# EAGLE board rev3 (EAGLE 9.4.2)
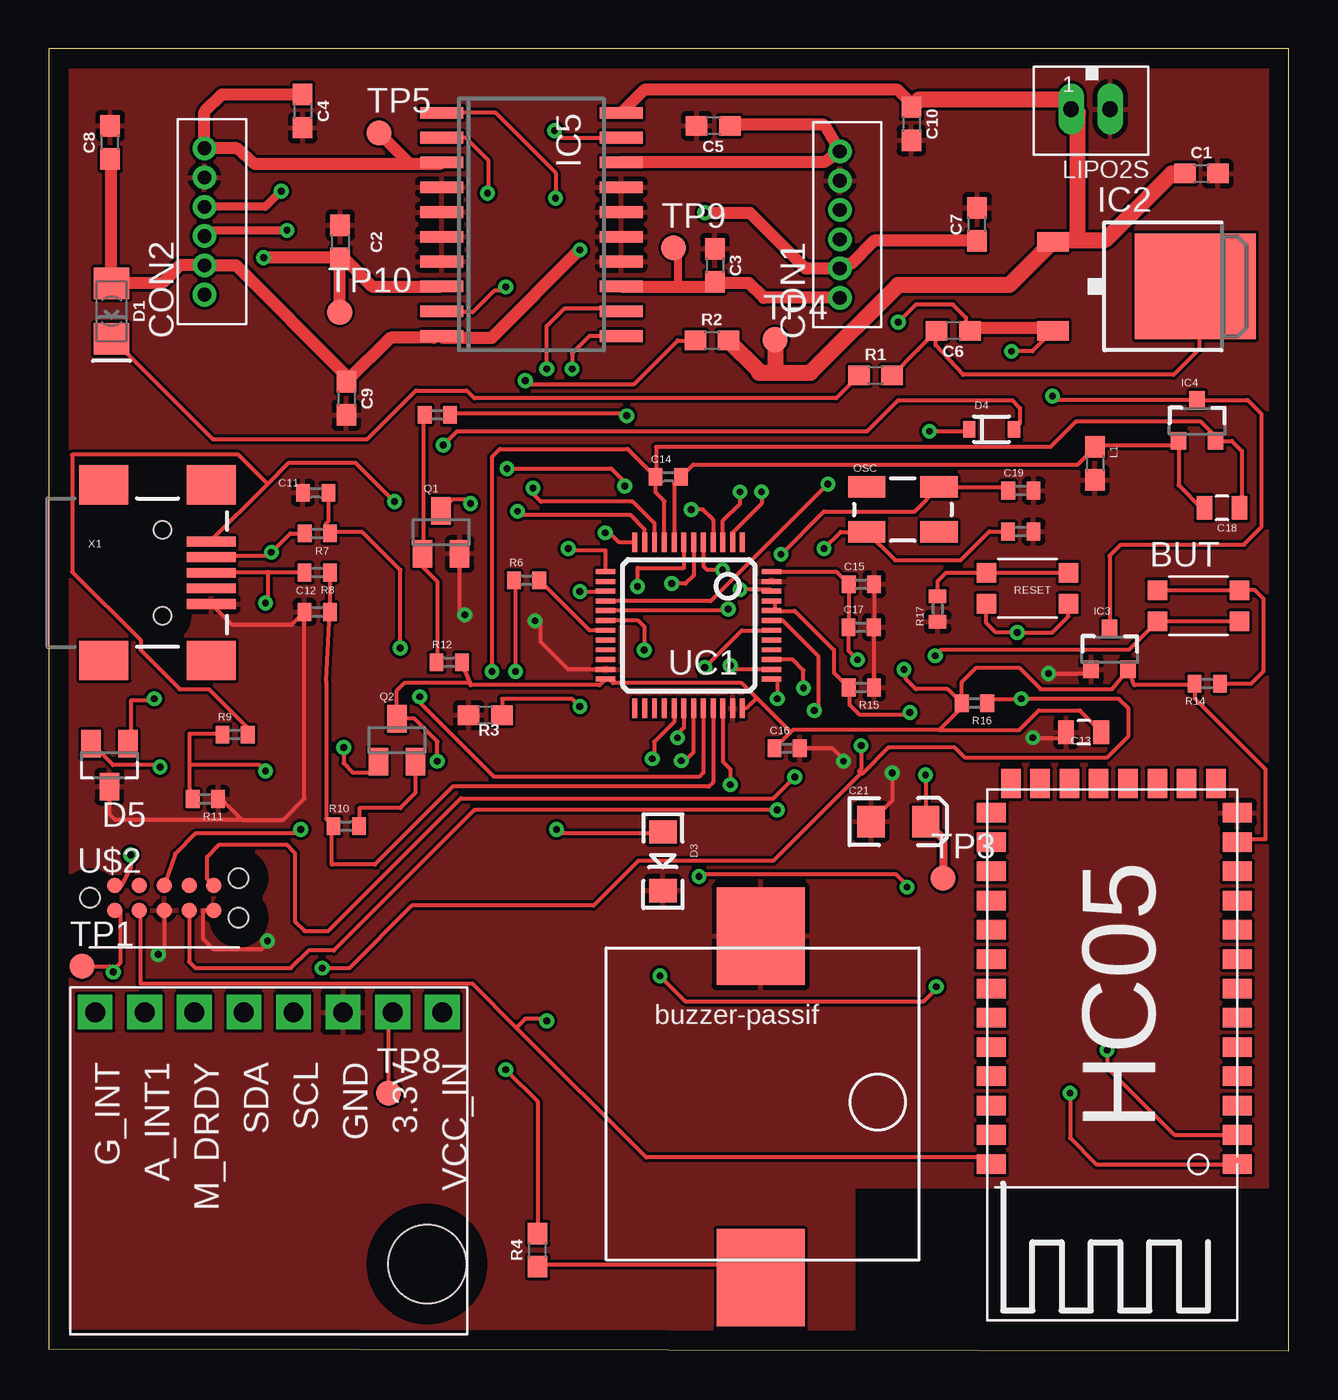
[diagram p0: board, top side]
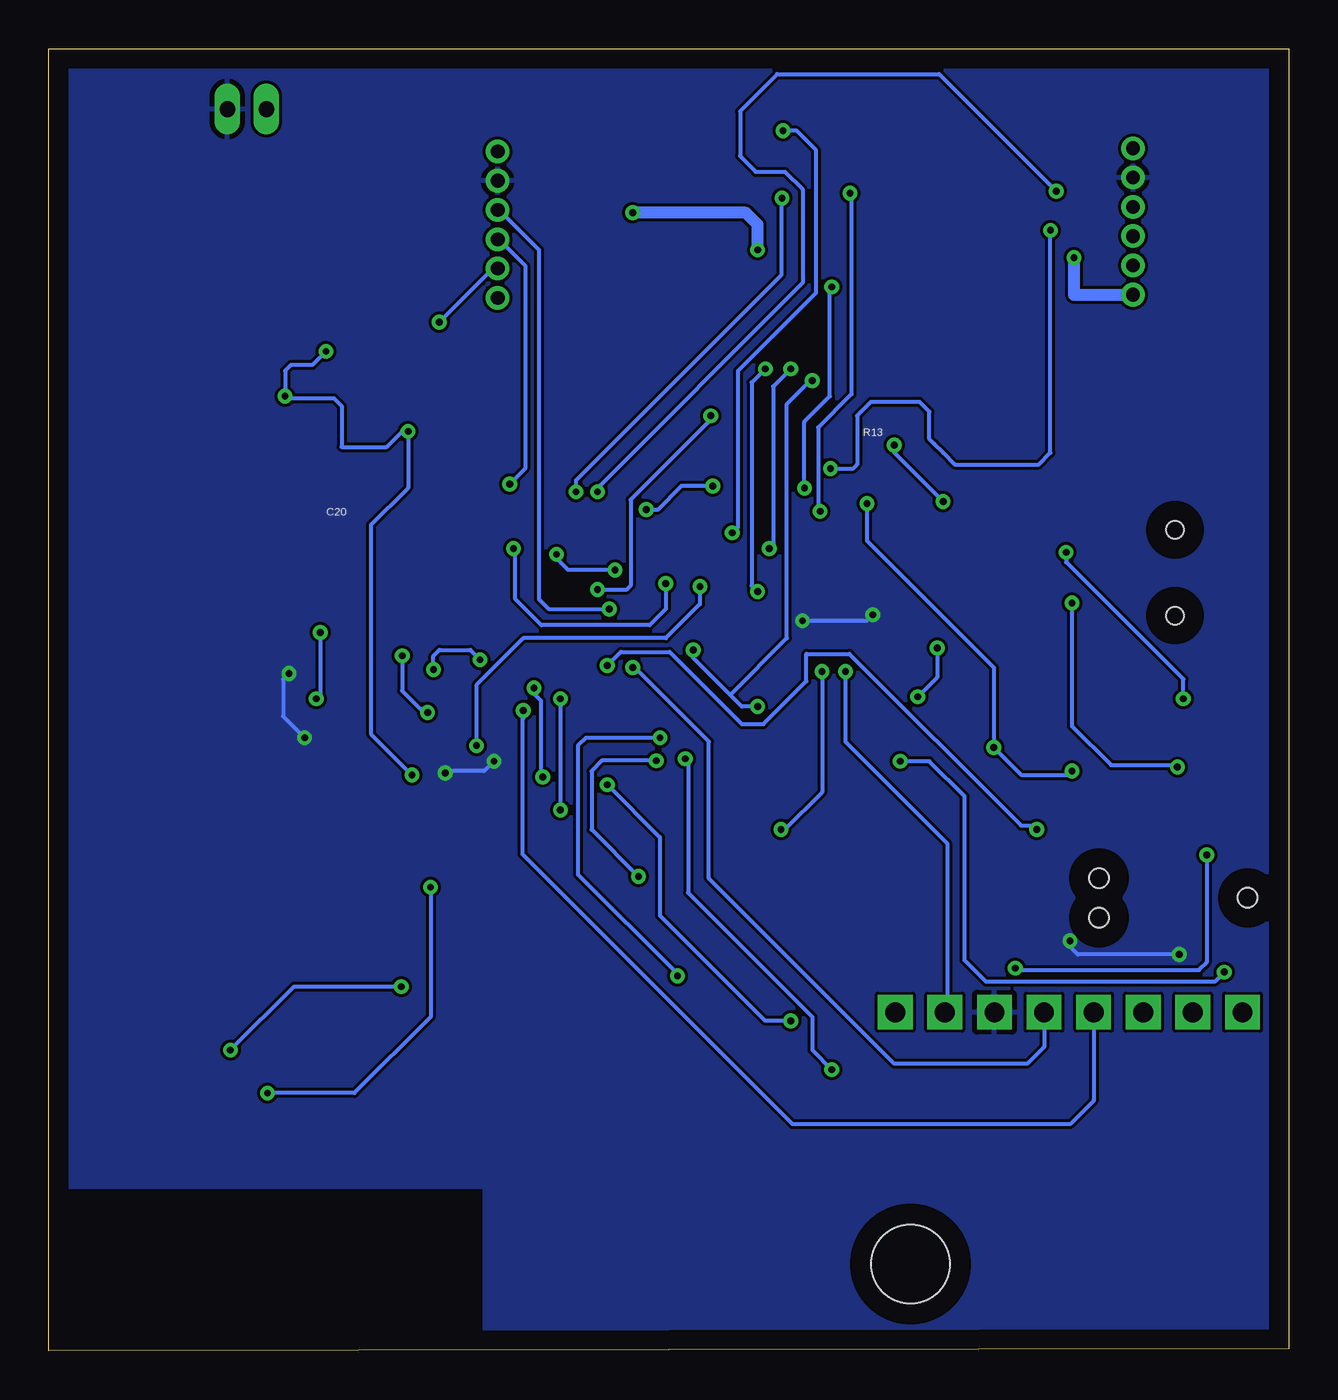
[diagram p1: board, bottom side, seen from below]

Size 63.5 x 66.7 mm. Coordinates in mm from the lower left corner, seen from the top.
Outline: 0,0.1 63.5,0 63.5,66.7 0,66.7 0,0.1
Copper layers (1*16): Top 0.035mm / dielectric 1.5mm / Bottom 0.035mm
Design rules "default": minimum track width 6mil, minimum drill 0.35mm, track to track 6mil, track to pad 6mil, pad to pad 6mil, via to via 6mil, smd to smd 6mil, copper to edge 40mil, drill to drill 6mil, minimum pad ring 10mil, minimum via ring 8mil, stop-mask expansion 4mil, vias tented up to drill 0mil, thermal gap 10mil
Net classes: 0 default: width 0.203 mm; 2 bigalime: width 0.381 mm

## Footprints (pad centres in the part's own frame; a part is rotated, then mirrored left to right if it is on the bottom)
PUSHBUTTON-KMR241GLFS = smd 1 x 1: P$1 2.1,0.8; P$2 2.1,-0.8; P$3 -2.1,0.8; P$4 -2.1,-0.8
0603 = smd 1.1 x 1: 1 -0.85,0; 2 0.85,0
C0402 = smd 0.7 x 0.9: 1 -0.65,0; 2 0.65,0
0805 = smd 0.8 x 1.2: 1 -0.9,0; 2 0.9,0
EIA3216 = smd 1.4 x 1.6: A 1.4,0; C -1.4,0
B6B-ZR = drill 0.7: 1 9,-1.3; 2 7.5,-1.3; 3 6,-1.3; 4 4.5,-1.3; 5 3,-1.3; 6 1.5,-1.3
FKIT-LED-1206 = smd 1.6 x 1.803: A -1.422,0; C 1.422,0
LED-1206 = smd 1.2 x 1.4: A -1.5,0; C 1.5,0
SOD-323 = smd 0.63 x 0.83: 1 -1.15,0; 2 1.15,0
SOT23 = smd 1 x 1.4: 1 -0.95,-1.1; 2 0.95,-1.1; 3 0,1.1
DPACK_3 = smd 1 x 1.6: 1 -2.28,-4.8; 3 2.28,-4.8 | smd 5.4 x 6.2: 4 0,2.5
SOT23' = smd 0.8 x 0.9: 1 -0.95,-1; 2 0.95,-1; 3 0,1.1
SO20 = smd 0.6 x 2.2: 1 -5.715,-4.6; 2 -4.445,-4.6; 3 -3.175,-4.6; 4 -1.905,-4.6; 5 -0.635,-4.6; 6 0.635,-4.6; 7 1.905,-4.6; 8 3.175,-4.6; 9 4.445,-4.6; 10 5.715,-4.6; 11 5.715,4.6; 12 4.445,4.6; 13 3.175,4.6; 14 1.905,4.6; 15 0.635,4.6; 16 -0.635,4.6; 17 -1.905,4.6; 18 -3.175,4.6; 19 -4.445,4.6; 20 -5.715,4.6
JST_B2B-PH_HEADER = drill 0.8 long: P1 1.075,0.048; P2 -0.925,0.048
CRYSTAL-SMD-5X3 = smd 1.9 x 1.1: 1 -1.85,-1.15; 2 1.85,-1.15; 3 1.85,1.15; 4 -1.85,1.15
B1,27 = smd 1.27 x 1.27: TP 0,0
BUZZER-PASSIF = smd 4.5 x 5: P$1 0,2.5; P$2 0,20
TC2030-MCP-NL = smd 0.787 x 0.787: 1 1.27,-0.635; 2 2.54,-0.635; 3 3.81,-0.635; 4 5.08,-0.635; 5 6.35,-0.635; 6 6.35,0.635; 7 5.08,0.635; 8 3.81,0.635; 9 2.54,0.635; 10 1.27,0.635 | hole 1: 0,0; 7.62,-1.016; 7.62,1.016
HC-05 = smd 1.5 x 1: 3.3 0,-16.5; GND 0,-18; KEY 12.6,0; P$3 0,-3; P$4 0,-4.5; P$5 0,-6; P$6 0,-7.5; P$7 0,-9; P$8 0,-10.5; P$9 0,-12; P$10 0,-13.5; P$11 0,-15; P$23 12.6,-1.5; P$24 12.6,-3; P$25 12.6,-4.5; P$26 12.6,-6; P$27 12.6,-7.5; P$28 12.6,-9; P$29 12.6,-10.5; P$30 12.6,-12; P$31 12.6,-13.5; P$32 12.6,-15; P$33 12.6,-16.5; P$34 12.6,-18; RX 0,-1.5; TX 0,0 | smd 1 x 1.5: P$14 1.1,-19.5; P$15 2.6,-19.5; P$16 4.1,-19.5; P$17 5.6,-19.5; P$18 7.1,-19.5; P$19 8.6,-19.5; P$20 10.1,-19.5; P$21 11.6,-19.5
GY-85 = drill 1.016 pad 1.778 square: 3.3 0,15.24; A_INT1 0,2.54; G_INT 0,0; GND 0,12.7; M_DRDY 0,5.08; SCL 0,10.16; SDA 0,7.62; VCC_IN 0,17.78 | hole 4: 12.9,17
LQFP48 = smd 0.254 x 1: 1 -2.75,-4.25; 2 -2.25,-4.25; 3 -1.75,-4.25; 4 -1.25,-4.25; 5 -0.75,-4.25; 6 -0.25,-4.25; 7 0.25,-4.25; 8 0.75,-4.25; 9 1.25,-4.25; 10 1.75,-4.25; 11 2.25,-4.25; 12 2.75,-4.25; 25 2.75,4.25; 26 2.25,4.25; 27 1.75,4.25; 28 1.25,4.25; 29 0.75,4.25; 30 0.25,4.25; 31 -0.25,4.25; 32 -0.75,4.25; 33 -1.25,4.25; 34 -1.75,4.25; 35 -2.25,4.25; 36 -2.75,4.25 | smd 1 x 0.254: 13 4.25,-2.75; 14 4.25,-2.25; 15 4.25,-1.75; 16 4.25,-1.25; 17 4.25,-0.75; 18 4.25,-0.25; 19 4.25,0.25; 20 4.25,0.75; 21 4.25,1.25; 22 4.25,1.75; 23 4.25,2.25; 24 4.25,2.75; 37 -4.25,2.75; 38 -4.25,2.25; 39 -4.25,1.75; 40 -4.25,1.25; 41 -4.25,0.75; 42 -4.25,0.25; 43 -4.25,-0.25; 44 -4.25,-0.75; 45 -4.25,-1.25; 46 -4.25,-1.75; 47 -4.25,-2.25; 48 -4.25,-2.75
USB-MINIB = smd 2.5 x 0.5: D+ 2.5,0; D- 2.5,0.8; GND 2.5,-1.6; ID 2.5,-0.8; VBUS 2.5,1.6 | smd 2.5 x 2: GND@1 -3,-4.5; GND@2 -3,4.5; GND@3 2.5,4.5; GND@4 2.5,-4.5 | hole 0.9: 0,2.2; 0,-2.2

## Placement (x,y rotation side)
BUT  KMR211GLFS  [PUSHBUTTON-KMR241GLFS]  58.87,38.16 0 top
C1  0.1uF  [0603]  59.03,60.31 0 top
C2  22nF  [0603]  14.92,56.81 270 top
C3  22nF  [0603]  34.11,55.61 270 top
C4  22nF  [0603]  13,63.51 270 top
C5  22nF  [0603]  34.03,62.76 180 top
C6  0.1uF  [0603]  46.32,52.26 180 top
C7  22nF  [0603]  47.54,57.71 90 top
C8  22nF  [0603]  3.14,61.9 90 top
C9  22nF  [0603]  15.24,48.79 270 top
C10  22nF  [0603]  44.18,62.86 270 top
C11  47pF  [C0402]  13.67,43.96 0 top
C12  47pF  [C0402]  13.74,37.84 0 top
C13  10uF  [0805]  53,31.68 180 top
C14  1uF  [C0402]  31.73,44.77 0 top
C15  1uF  [C0402]  41.62,39.27 0 top
C16  1uF  [C0402]  37.81,30.87 0 top
C17  1uF  [C0402]  41.6,37.07 0 top
C18  10uF  [0805]  60.09,43.18 180 top
C19  18pF  [C0402]  49.79,44.07 0 top
C20  18pF  [C0402]  49.78,41.97 0 top
C21  100uF  [EIA3216]  43.51,27.11 0 top
CON1  B6B-ZR  [B6B-ZR]  39.21,52.44 90 top
CON2  B6B-ZR  [B6B-ZR]  6.67,52.6 90 top
D1  [FKIT-LED-1206]  3.21,53.26 270 top
D3  Blue  [LED-1206]  31.45,25.08 270 top
D4  [SOD-323]  48.29,47.21 0 top
D5  PESD1CAN  [SOT23]  3.1,30 180 top
IC2  MC78M05ABDT  [DPACK_3]  56.22,54.53 270 top
IC3  MCP1703T-3302E/CB  [SOT23']  54.33,35.91 0 top
IC4  MCP1703T-3302E/CB  [SOT23']  58.81,47.61 0 top
IC5  L293DD  [SO20]  24.72,57.7 270 top
L1  ferrite bead  [0603]  53.58,45.46 270 top
LIPO2S  JST-PH_2-PIN_HEADER  [JST_B2B-PH_HEADER]  53.43,63.65 180 top
OSC  8MHz  [CRYSTAL-SMD-5X3]  43.74,43.1 0 top
Q1  NPN-BJT  [SOT23]  20.09,41.93 0 top
Q2  NPN-BJT  [SOT23]  17.83,31.28 0 top
R1  133  [0603]  42.34,49.97 0 top
R2  60k  [0603]  33.96,51.76 0 top
R3  30k  [0603]  22.35,32.56 180 top
R4  100  [0603]  25.04,5.16 90 top
R6  1k  [C0402]  24.47,39.47 0 top
R7  22  [C0402]  13.76,41.87 180 top
R8  22  [C0402]  13.75,39.87 180 top
R9  10k  [C0402]  9.54,31.57 0 top
R10  1.5k  [C0402]  15.23,26.87 0 top
R11  36k  [C0402]  8.02,28.27 180 top
R12  47k  [C0402]  20.51,35.27 0 top
R13  1k  [C0402]  19.9,47.95 180 top
R14  1k  [C0402]  59.33,34.18 180 top
R15  10k  [C0402]  41.62,33.98 180 top
R16  10k  [C0402]  47.41,33.18 180 top
R17  1k  [C0402]  45.52,38 90 top
RESET  KMR211GLFS  [PUSHBUTTON-KMR241GLFS]  50.12,39.06 0 top
TP1  PTR1B1,27  [B1,27]  1.7,19.7 0 top
TP3  PTR1B1,27  [B1,27]  45.8,24.2 0 top
TP4  PTR1B1,27  [B1,27]  37.2,51.8 0 top
TP5  PTR1B1,27  [B1,27]  16.9,62.4 0 top
TP8  PTR1B1,27  [B1,27]  17.4,13.2 0 top
TP9  PTR1B1,27  [B1,27]  32,56.5 0 top
TP10  PTR1B1,27  [B1,27]  14.9,53.2 0 top
U$1  BUZZER-PASSIF  [BUZZER-PASSIF]  36.46,23.74 180 top
U$2  TC2050-MCP-NL  [TC2030-MCP-NL]  2.1,23.2 0 top
U$4  HC05  [HC-05]  60.87,9.56 180 top
U$6  GY-85  [GY-85]  2.37,17.34 270 top
UC1  STM32F103CBT6  [LQFP48]  32.77,37.16 180 top
X1  USB-MINIB  [USB-MINIB]  5.82,39.86 0 top

## Library data of the parts
BUT IC3 IC4 RESET = okie
C1 C6 = SparkFun-Capacitors; PROD_ID: CAP-00810
C2-C5 C7-C10 = SparkFun-Capacitors; PROD_ID: CAP-07885
C11 C12 C14-C17 C19 C20 D3 R6-R17 = SparkFun
C13 C18 OSC Q1 Q2 X1 = SparkFun2
C21 D4 L1 = SparkFun3
CON1 CON2 = jst
D1 = SparkFun-LED
D5 = diode
IC2 = linear
IC5 = st-microelectronics; OC_FARNELL: unknown
LIPO2S = srg
R1-R4 = SparkFun-Resistors; PROD_ID: RES-08787
TP1 TP3-TP5 TP8-TP10 = testpad
U$1 = buzzer_smd
U$2 = TC2050
U$4 = rhoban; FARNELL: MODULE HC-05
U$6 = rhoban
UC1 = stm32

## Nets
1A: IC5.2 UC1.11
2A: IC5.9 UC1.10
3/AIN: R2.1 R3.1 UC1.18
3A: IC5.12 UC1.13
4A: IC5.19 UC1.12
5V: C6.1 C7.1 C8.1 C9.1 C21.A CON1.5 CON2.5 D1.A D4.1 IC2.3 IC3.3 IC4.3 IC5.10 TP3.TP
9V: C1.1 C10.1 IC2.1 IC5.20 LIPO2S.P1 R2.2 TP4.TP
23_USBDP: C12.2 R8.1 R10.1 UC1.33
24_USBDM: C11.2 R7.1 UC1.32
27/PWM: R4.2 UC1.29
32: BUT.P$2 BUT.P$4 R15.2 UC1.44 UC1.45
33: R6.2 UC1.19
+5V/2: D4.2 R9.2 X1.VBUS
AV+: C14.1 C18.1 IC4.2 TP8.TP U$6.3.3 UC1.9
AV-: C14.2 C18.2 IC4.1 L1.1 UC1.8
DGND: C1.2 C2.1 C3.1 C4.2 C5.2 C7.2 C8.2 C9.2 C10.2 C11.1 C12.1 C13.2 C15.2 C16.2 C17.2 C19.2 C20.2 C21.C CON1.2 CON2.2 D3.C D5.3 IC3.1 IC5.4 IC5.5 IC5.6 IC5.7 IC5.14 IC5.15 IC5.16 IC5.17 L1.2 LIPO2S.P2 Q1.2 R3.2 R11.1 R15.1 R17.1 U$1.P$1 U$2.3 U$2.5 U$4.GND U$6.GND UC1.23 UC1.35 UC1.47 X1.GND
DISC: R13.1 UC1.46
EN: U$2.2 U$4.KEY UC1.34
GNDA: C6.2 IC2.4 R1.2
MM4: CON2.3 UC1.3
MM5: CON2.4 UC1.4
MM6: CON1.4 UC1.16
MM7: CON1.3 UC1.17
MM28: IC5.1 UC1.2
MM29: IC5.11 UC1.15
N$1: D1.C R1.1
N$2: R4.1 U$1.P$2
N$3: U$2.6 UC1.39
N$4: U$2.8 UC1.38
N$5: U$2.4 UC1.37
N$6: UC1.40
N$20: BUT.P$1 BUT.P$3 R14.1
N$21: R17.2 RESET.P$1 RESET.P$3
N$22: D3.A R6.1
N$51: Q2.2 R10.2
N$59: D5.1 R7.2 X1.D-
N$60: D5.2 R8.2 X1.D+
N$71: Q1.3 Q2.1 R9.1 R11.2
N$73: Q1.1 R12.1 R13.2
NONE: U$6.VCC_IN
OSC_IN: C19.1 OSC.3 UC1.5
OSC_OUT: C20.1 OSC.1 UC1.6
OUT1: C4.1 CON2.1 IC5.3 TP5.TP
OUT2: C2.2 CON2.6 IC5.8 TP10.TP
OUT3: C3.2 CON1.6 IC5.13 TP9.TP
OUT4: C5.1 CON1.1 IC5.18
RESET: R16.1 RESET.P$2 RESET.P$4 U$2.10 UC1.7
RX: U$4.RX UC1.30
SCL: U$6.SCL UC1.42
SDA: U$6.SDA UC1.43
TX: U$4.TX UC1.31
VBAT: UC1.1
VCC: C13.1 C15.1 C16.1 C17.1 IC3.2 Q2.3 R12.2 R14.2 R16.2 TP1.TP U$2.1 U$4.3.3 UC1.24 UC1.36 UC1.48

## Tracks (layer width: path | path; a pad name or v marks a point on that pad's centre or on a via)
1A  (via drill 0.35)
  Top 0.203: UC1.11 30.52,42.08 29.8,42.8 24.2,42.8 v24,43 | v22.47,59.3 22.5,59.33 22.5,61 21.36,62.14 IC5.2
  Bottom 0.203: v24,43 24.1,43.1 24.1,47.3 22.4,49 22.4,59.23 v22.47,59.3
2A  (via drill 0.35)
  Top 0.203: UC1.10 31.02,42.38 29.9,43.5 25.2,43.5 24.8,43.9 v24.8,44.2 | v23.4,54.5 23.2,54.3 22.8,54.3 21.7,53.2 20.17,53.2 IC5.9
  Bottom 0.203: v24.8,44.2 24.8,47.6 23.5,48.9 23.5,54.4 v23.4,54.5
3/AIN  (via drill 0.35)
  Top 0.203: v30.5,35.9 30.5,37.1 30.2,37.4 28.7,37.4 UC1.18 | v27.2,33 26.8,33.4 23.21,33.4 R3.1 | v24.4,49.7 24.6,49.5 29.95,49.5 32.21,51.76 R2.1
  Bottom 0.203: 28.6,33.6 28,33 v27.2,33 | 28.6,33.6 30.5,35.5 v30.5,35.9 | v24.4,49.7 24.4,49.8 25.7,48.5 25.7,36.5 28.6,33.6
3A  (via drill 0.35)
  Top 0.203: v26.6,41.1 26.6,41 28.5,41 28.5,39.91 UC1.13 | v25.5,50.3 25.5,52.5 26.4,53.4 29.2,53.4 IC5.12
  Bottom 0.203: v25.5,50.3 26.4,49.4 26.4,41.3 v26.6,41.1
4A  (via drill 0.35)
  Top 0.203: UC1.12 29.22,41.41 28.73,41.9 v28.5,41.9 | v25.9,62.5 26.26,62.14 IC5.19
  Bottom 0.203: v28.5,41.9 28.2,42.2 28.2,50.2 24.2,54.2 24.2,61.5 25.2,62.5 v25.9,62.5
5V  (via drill 0.35)
  Top 0.203: 47.3,52.4 C6.1 46.97,52.46 46.97,52.93 46.3,53.6 44.4,53.6 v43.5,52.7 | 51.2,52.4 IC2.3 50.38,51.2 v49.3,51.2 | 19.7,51.9 IC5.10 20.2,51.9 | 3.2,61.02 C8.1 | 3.2,54.9 D1.A | 15.18,50.02 C9.1 | D4.1 47.03,47.1 v45.1,47.1 | v51.4,48.9 51.6,48.7 IC4.3 61.39,48.71 62.1,48 62.1,42.2 61.2,41.3 54.9,41.3 54.33,40.73 IC3.3 | v44.9,29.5 C21.A
  Top 0.406: C21.A 45.8,26.21 TP3.TP
  Top 0.61: 51.2,52.4 47.3,52.4 | C7.1 42.26,56.86 41.1,55.7 40.51,55.7 CON1.5 38.76,55.44 35.9,58.3 v33.6,58.3 | C9.1 17.5,51.9 19.7,51.9 | 3.2,54.9 3.2,61.02 | D1.A 3.23,54.7 5.8,54.7 6.7,55.6 CON2.5 9.6,55.6 15.18,50.02 | v27.2,56.4 22.7,51.9 20.2,51.9
  Bottom 0.203: v43.5,52.7 40.8,55.4 40.6,55.4 | v44.9,29.5 47,31.6 47,42.3 45.1,44.2 v45.1,47.1 45.4,47.1 46.2,46.3 48.5,46.3 48.5,48.4 48.9,48.8 51.3,48.8 v51.4,48.9 51.4,50.2 51.1,50.5 50,50.5 v49.3,51.2
  Bottom 0.61: 40.6,55.4 CON1.5 | v27.2,56.4 27.2,57.7 27.8,58.3 v33.6,58.3
9V
  Top 0.203: 51.7,56.9 IC2.1 | 52.7,63.4 LIPO2S.P1 | 36.37,50.2 36.37,50.1
  Top 0.61: C10.1 44.18,63.91 43.48,64.6 30.5,64.6 IC5.20
  Top 0.813: C10.1 44.57,64.1 51.86,64.1 LIPO2S.P1 | IC2.1 49.2,54.6 43.5,54.6 39,50.1 37.2,50.1 | C1.1 57.51,60.31 54.1,56.9 52.7,56.9 | 51.7,56.9 52.7,56.9 | 52.7,56.9 52.7,63.4 | 36.37,50.1 37.2,50.1 | TP4.TP 37.2,50.1 | R2.2 36.37,50.2
23_USBDP
  Top 0.203: UC1.33 34.02,29.12 33.8,28.9 20.7,28.9 16.7,24.9 14.5,24.9 14.5,26.79 R10.1 14.2,27.24 14.2,34.3 C12.2 14.4,38.2 R8.1
24_USBDM  (via drill 0.35)
  Top 0.203: UC1.32 33.52,29.62 33.3,29.4 22.8,29.4 19,33.2 v19,33.5 | v18,36 18,40 16.06,41.94 14.34,41.94 | C11.2 14.32,42.52 14.2,42.4 14.2,42.07 14.34,41.94 | 14.34,41.94 R7.1
  Bottom 0.203: v18,36 18,34.5 v19,33.5
27/PWM  (via drill 0.35)
  Top 0.203: UC1.29 32.02,32.21 31,31.19 31,30.33 v30.9,30.33 | v23.4,14.4 25.04,12.76 R4.2
  Bottom 0.203: v30.9,30.33 30.76,30.33 30.76,23.46 24.4,17.1 24.4,15.4 v23.4,14.4
32  (via drill 0.35)
  Top 0.203: 37.2,37.9 38.2,37.9 40.2,35.9 40.2,34.74 R15.2 41,33.95 41,33.1 41.5,32.6 44,32.6 v44.1,32.7 | 37.2,37.9 37.2,38.4 UC1.45 | 37.2,37.9 UC1.44 | v45.4,35.6 45.7,35.9 55.31,35.9 BUT.P$4 BUT.P$2
  Bottom 0.203: v45.4,35.6 45.4,33.8 44.5,32.9 44.3,32.9 v44.1,32.7
33
  Top 0.203: R6.2 25.2,39.4 27.7,36.9 28.2,36.9 UC1.19
+5V/2  (via drill 0.35)
  Top 0.203: D4.2 49.74,47.51 49.74,48.29 49.33,48.7 43.5,48.7 41.9,47.1 20.9,47.1 v20.2,46.4 | v17.7,43.5 15.7,45.5 12.3,45.5 11.2,44.4 | 11.2,44.4 8.2,41.4 X1.VBUS | 11.2,44.4 9.7,45.9 1.2,45.9 1.2,39.9 4.7,36.4 4.7,35.9 6.7,33.9 8.2,33.9 10.2,31.9 R9.2
  Bottom 0.203: v17.7,43.5 20.2,46 v20.2,46.4
AV+  (via drill 0.35)
  Top 0.203: C14.1 31.1,44.79 31.1,46.3 51.3,46.3 52.6,47.6 59,47.6 59.76,46.84 IC4.2 60.59,46.61 61.1,46.1 61.1,43.29 C18.1 | UC1.9 31.52,43.52 31.08,43.97 C14.1 | v22.7,34.8 22.7,45.8 23.1,46.2 29.64,46.2 C14.1 | TP8.TP 17.4,17.13 U$6.3.3
  Bottom 0.203: U$6.3.3 17.5,17.45 17.5,26 22.7,31.2 v22.7,34.8
AV-
  Top 0.203: UC1.8 32.02,44.41 C14.2 33.01,45.4 52.7,45.4 53.2,45.9 L1.1 53.7,46.4 57.7,46.4 IC4.1 57.86,44.34 59.02,43.18 C18.2
DGND  (via drill 0.35)
  Top 0.203: UC1.23 26.59,34.91 25.2,36.3 25.2,37.4 v24.9,37.4 | v21.3,37.7 21.04,37.96 Q1.2 | D5.3 3.1,27.5 3.4,27.2 9.9,27.2 | U$2.3 5.91,20.61 v5.6,20.3 | v11.2,21 11.2,20.88 10.89,20.57 8.43,20.57 7.9,21.1 7.9,22.56 U$2.5 | 9.9,27.2 12,27.2 13.09,28.29 C12.1 12.45,37.2 9.38,37.2 X1.GND | C13.2 51.8,31.38 50.42,31.38 v50.4,31.4 | v51.2,34.7 53.17,34.7 IC3.1 | C16.2 40.13,30.87 40.7,30.3 v40.7,30.2 | v43.2,29.6 43.2,28.2 C21.C | R11.1 8.83,28.27 9.9,27.2 | C15.2 42.27,37.09 C17.2 42.25,34 R15.1
  Bottom 0.203: v24.9,37.4 21.6,37.4 v21.3,37.7 | v5.6,20.3 10.8,20.3 11.1,20.6 11.1,20.9 v11.2,21 | v51.2,34.7 51.5,34.4 51.5,32.5 v50.4,31.4 | v40.7,30.2 41.2,29.7 43.1,29.7 v43.2,29.6
  pour Top: 0.2,66.4 63.2,66.4 63.2,8.4 41.2,8.4 41.2,0.4 0.2,0.4
  pour Bottom: 0.2,66.4 63.2,66.4 63.2,8.4 41.2,8.4 41.2,0.4 1.2,0.4 0.2,0.4
DISC  (via drill 0.35)
  Top 0.203: v29.6,47.9 29.5,48 20.61,48 R13.1 | UC1.46 36.93,39 v35.4,39
  Bottom 0.203: v29.6,47.9 29.6,47.7 33.7,43.6 33.7,39.2 33.9,39 v35.4,39
EN  (via drill 0.35)
  Top 0.203: 23.95,16.55 30.6,9.9 47.75,9.9 U$4.KEY | 23.95,16.55 21.7,18.8 4.7,18.8 4.7,22.57 U$2.2 | UC1.34 34.52,30.18 34.9,29.8 v34.9,29 | v25.5,16.9 25.4,17 24.4,17 23.95,16.55
  Bottom 0.203: v34.9,29 32.2,26.3 32.2,22.3 26.8,16.9 v25.5,16.9
GNDA
  Top 0.203: R1.2 44.5,51.28 C6.2 45.41,51.52 46.82,50 57.6,50 58.92,51.32 58.92,54.33 IC2.4
MM4  (via drill 0.35)
  Top 0.203: UC1.3 34.5,41.43 34.5,42.5 35.4,43.4 v35.4,44 | v11.9,59.4 11.7,59.2 11.67,59.2
  Top 0.406: 11.67,59.2 11.07,58.6 CON2.3
  Bottom 0.203: v35.4,44 35.3,43.9 35.27,44.33 25.2,54.4 24.96,54.64 24.9,54.7 24.9,59.5 25.8,60.4 27.3,60.4 28.1,61.2 28.1,63.5 26.2,65.4 17.9,65.4 v11.9,59.4
MM5  (via drill 0.35)
  Top 0.203: v23.47,45.2 28.8,45.2 29.5,44.5 v29.5,44.3 | v32.9,43.1 33.5,43.1 34.02,42.58 UC1.4
  Top 0.406: CON2.4 8.27,57.4 v12.2,57.4
  Bottom 0.203: v12.2,57.4 12.2,46 12.8,45.4 17.1,45.4 17.7,46 18.15,46.45 18.4,46.7 18.4,48.1 18.9,48.6 21.4,48.6 22.1,47.9 22.1,45.4 22.3,45.2 v23.47,45.2 | v29.5,44.3 31.1,44.3 32.3,43.1 v32.9,43.1
MM6  (via drill 0.35)
  Top 0.203: v39.9,44.4 33.9,38.4 28.7,38.4 UC1.16
  Bottom 0.203: v39.9,44.4 39.1,45.2 39.1,55.6 40.34,56.84 40.41,56.84 CON1.4
MM7  (via drill 0.35)
  Top 0.203: v34.8,38 34.71,37.91 UC1.17
  Bottom 0.203: v34.8,38 37.9,38 38.4,38.5 38.4,56.4 40.44,58.44 CON1.3
MM28  (via drill 0.35)
  Top 0.203: v36.5,44 36.5,43.4 35,41.9 35,41.43 UC1.2 | v25.95,59.05 25.95,60.35 22.89,63.41 IC5.1
  Bottom 0.203: v36.5,44 36.5,44.6 26,55.1 26,59 v25.95,59.05
MM29  (via drill 0.35)
  Top 0.203: v27.2,38.9 28.2,38.9 UC1.15 | IC5.11 27.68,51.98 26.8,51.1 v26.8,50.3
  Bottom 0.203: v27.2,38.9 27.5,39.2 27.5,49.6 v26.8,50.3
N$1
  Top 0.203: R1.1 40.33,48.8 21.8,48.8 21.4,49.2 18.8,49.2 16.3,46.7 8.4,46.7 3.7,51.4 D1.C
N$2
  Top 0.203: R4.1 25.2,4.4 36.09,4.4 U$1.P$2
N$3  (via drill 0.35)
  Top 0.203: v38.2,29.4 37.1,28.3 21.1,28.3 14.3,21.5 13.1,21.5 12.6,22 12.6,25.5 12.2,25.9 8.7,25.9 8.1,25.3 8.1,24.18 U$2.6 | v38.65,33.95 38.65,34.85 38.09,35.41 UC1.39
  Bottom 0.203: v38.2,29.4 38.3,29.5 38.3,33.3 38.65,33.65 v38.65,33.95
N$4  (via drill 0.35)
  Top 0.203: v12.9,26.7 12.7,26.5 7.5,26.5 6.46,25.46 U$2.8 | v34.9,35.1 35.1,34.9 36.7,34.9 UC1.38
  Bottom 0.203: v12.9,26.7 13.1,26.9 13.7,26.9 22.5,35.7 24.7,35.7 24.7,34.3 26.9,32.1 28,32.1 31.7,35.8 34.2,35.8 v34.9,35.1
N$5  (via drill 0.35)
  Top 0.203: v37.3,27.7 21.8,27.7 14.6,20.5 13.3,20.5 12.4,19.6 7.5,19.6 7.18,19.92 U$2.4 | v37.3,33.4 37.3,34.39 UC1.37
  Bottom 0.203: v37.3,33.4 v37.3,27.7
N$20
  Top 0.203: R14.1 61.58,34.18 62.2,34.8 62.2,38.53 61.77,38.96 BUT.P$1 BUT.P$3
N$21
  Top 0.203: RESET.P$1 RESET.P$3 45.96,39.86 45.52,39.42 R17.2
N$22  (via drill 0.35)
  Top 0.203: R6.1 23.9,39.38 v23.9,34.8 | D3.A 31.37,26.5 26.2,26.5 v26,26.7
  Bottom 0.203: v23.9,34.8 23.9,28.6 25.8,26.7 v26,26.7
N$51
  Top 0.203: R10.2 15.9,26.89 15.9,27.8 18,27.8 18.78,28.58 Q2.2
N$59  (via drill 0.35)
  Top 0.203: X1.D- 8.38,40.7 11.2,40.7 v11.4,40.9 12.37,41.87 R7.2 | v5.4,33.4 5.3,33.3 4.2,33.3 4.2,31.4 D5.1
  Bottom 0.203: v11.4,40.9 11.4,40.4 5.4,34.4 v5.4,33.4
N$60  (via drill 0.35)
  Top 0.203: X1.D+ 8.7,39.9 11.2,39.9 11.2,39.87 | D5.2 2.2,31.1 3.3,30 5.6,30 v5.7,29.9 | R8.2 11.2,39.87 | 11.2,39.87 11.2,38.3 v11.1,38.3
  Bottom 0.203: v5.7,29.9 5.8,30 9.1,30 11.1,32 v11.1,38.3
N$71  (via drill 0.35)
  Top 0.203: 7.2,30 7.2,31.6 8.85,31.6 R9.1 | R11.2 7.28,28.36 7.2,28.9 7.2,30 | v15.1,30.9 15.1,30.1 15.6,29.6 16.74,29.6 Q2.1 | v11.1,29.7 10.8,30 7.2,30 | v21.6,43.4 21.4,43.6 20.66,43.6 Q1.3
  Bottom 0.203: v11.1,29.7 11.3,29.5 13.7,29.5 v15.1,30.9 15.1,35 21.6,41.5 v21.6,43.4
N$73
  Top 0.203: R12.1 19.9,35.36 19.9,39.4 19.14,40.16 Q1.1 19.2,41.01 19.2,47.9 R13.2
OSC_IN  (via drill 0.35)
  Top 0.203: v34.5,40 33.73,40 33.52,40.21 UC1.5 | v37.5,40.8 39.7,43 44.34,43 OSC.3 48.96,44.25 C19.1
  Bottom 0.203: v34.5,40 36.9,40 37.5,40.6 v37.5,40.8
OSC_OUT  (via drill 0.35)
  Top 0.203: UC1.6 33.02,39.72 32.6,39.3 v31.9,39.3 | v39.7,41.1 40.55,41.95 OSC.1 43.34,40.5 46.7,40.5 48.17,41.97 C20.1
  Bottom 0.203: v31.9,39.3 31.9,38 32.73,37.17 38.27,37.17 39.6,38.5 39.6,41 v39.7,41.1
OUT1
  Top 0.203: 18.4,60.9 18.4,60.8
  Top 0.61: C4.1 8.86,64.36 7.97,63.47 CON2.1 9.65,61.6 10.55,60.8 18.4,60.8 20.04,60.8 IC5.3 | TP5.TP 18.4,60.9
OUT2  (via drill 0.35)
  Top 0.203: 15.2,55.9 C2.2 14.9,55.98 14.88,56 | 20.04,54.5 IC5.8
  Top 0.61: 15.2,55.9 16.6,54.5 20.04,54.5 | 14.88,56 v11,56 | TP10.TP 14.9,55.98
  Bottom 0.61: CON2.6 11,54.1 v11,56
OUT3
  Top 0.203: 34.23,54.7 C3.2 | 29.39,54.5 IC5.13 | TP9.TP 32.2,56.3
  Top 0.406: 32.2,56.3 32.2,54.5
  Top 0.61: CON1.6 36.61,53.94 35.85,54.7 34.23,54.7 | 29.39,54.5 32.2,54.5 33.73,54.5 C3.2
OUT4
  Top 0.203: C5.1 34.92,62.8
  Top 0.61: 34.92,62.8 39.71,62.8 CON1.1 39.71,60.9 29.34,60.9 IC5.18
RESET  (via drill 0.35)
  Top 0.203: 41.6,29.6 37.1,25.1 30.2,25.1 27.9,22.8 18.6,22.8 15.4,19.6 v14,19.6 | U$2.10 3.73,23.83 4.2,24.8 v4.2,25.4 | R16.1 48.2,33.4 v49.8,33.4 54.8,33.4 55.3,32.9 55.3,31.5 54.2,30.4 46.9,30.4 46.4,30.9 43,30.9 41.65,29.55 41.6,29.6 | v41.6,31 41.6,29.8 41.5,29.7 41.6,29.6 | v30.15,39.15 30.15,40.11 32.52,40.11 UC1.7 | RESET.P$2 52.22,37.62 51.4,36.8 v49.6,36.8 48.5,36.8 48.02,37.28 RESET.P$4
  Bottom 0.203: v30.15,39.15 30.15,38.25 31.9,36.5 39.2,36.5 41.6,34.1 v41.6,31 | v49.6,36.8 49.6,33.6 v49.8,33.4 | v14,19.6 13.9,19.5 4.6,19.5 4.2,19.9 v4.2,25.4
RX  (via drill 0.35)
  Top 0.203: UC1.30 32.52,31.92 32.2,31.6 v32.2,31.4 | v31.3,19.2 32.6,17.9 44.8,17.9 45.5,18.6 v45.45,18.65 | v54.2,15.4 54.2,14.5 57.64,11.06 U$4.RX
  Bottom 0.203: v32.2,31.4 36,31.4 36.4,31 36.4,24.4 31.4,19.4 31.3,19.4 v31.3,19.2 | v45.45,18.65 50.95,18.65 v54.2,15.4
SCL  (via drill 0.35)
  Top 0.203: v33.6,35 35.5,36.9 36.7,36.9 UC1.42
  Bottom 0.203: v33.6,35 33.5,34.9 33.4,34.9 29.7,31.2 29.7,24.2 20.2,14.7 13.4,14.7 12.53,15.57 U$6.SCL
SDA  (via drill 0.35)
  Top 0.203: v39.2,32.8 39.4,33 39.4,35.6 37.6,37.4 37.2,37.4 UC1.43
  Bottom 0.203: v39.2,32.8 39.2,32.4 39.23,32.43 39.23,25.43 25.4,11.6 11.2,11.6 9.99,12.81 U$6.SDA
TX  (via drill 0.35)
  Top 0.203: v32.39,30.23 32.59,30.23 33.02,30.66 UC1.31 | UC1.31 | v33.3,24.3 33.4,24.4 43.4,24.4 44,23.8 v43.95,23.75 | U$4.TX 53.64,9.56 52.3,10.9 v52.3,13.2
  Bottom 0.203: v43.95,23.75 43.95,17.1 47.85,13.2 v52.3,13.2 | v32.39,30.23 35.17,30.23 35.7,29.7 35.7,26.7 v33.3,24.3
VCC  (via drill 0.35)
  Top 0.203: 21.57,34.2 21.6,34.12 21.6,34.1 28.21,34.1 UC1.24 28.7,34.4 28.9,34.2 35.5,34.2 36.25,33.45 | 21.57,34.2 R12.2 | 21.57,34.2 18.2,34.2 17.83,33.83 Q2.3 18.72,32.38 19.9,31.2 v19.9,30.2 | U$4.3.3 60.89,26.2 62.3,26.2 62.3,29.8 58.68,33.42 R14.2 58.6,34.1 55.6,34.1 IC3.2 54.46,33.9 50.8,33.9 49.7,35 47.5,35 46.76,34.26 R16.2 | 38,31.7 38.1,31.8 45.6,31.8 | 38,31.7 37.2,30.9 C16.1 | 45.6,31.8 46.7,32.9 R16.2 | 45.6,31.8 49.7,31.8 50.7,32.8 52.8,32.8 53.7,31.9 C13.1 | 38,31.7 36.25,33.45 | U$2.1 3.67,22.56 3.67,19.87 3.3,19.5 | v3.3,19.4 3.3,19.5 | 36.25,33.45 35.71,32.91 UC1.36 | 40.97,37.09 C17.1 | UC1.48 40.33,39.91 C15.1 40.97,37.09 | R16.2 46.04,33.9 44.4,33.9 43.9,34.4 43.9,34.8 v43.8,34.9 | v41.42,35.4 40.97,35.85 40.97,37.09 | TP1.TP 3.1,19.7 3.3,19.5
  Bottom 0.203: v3.3,19.4 3.8,18.9 15.5,18.9 16.6,20 16.6,28.4 18.4,30.2 v19.9,30.2 | v43.8,34.9 43.8,35.6 43.5,35.9 41.92,35.9 v41.42,35.4